# Altium PCB PCB.PcbDoc
Units mm, origin at the board's own origin, x right, y up, seen from the top; angles counter-clockwise.
Board outline 38 x 38 mm, 2 copper layers (Top Layer, Bottom Layer); 32 components, 17 nets, 108 pads, 251 vias.
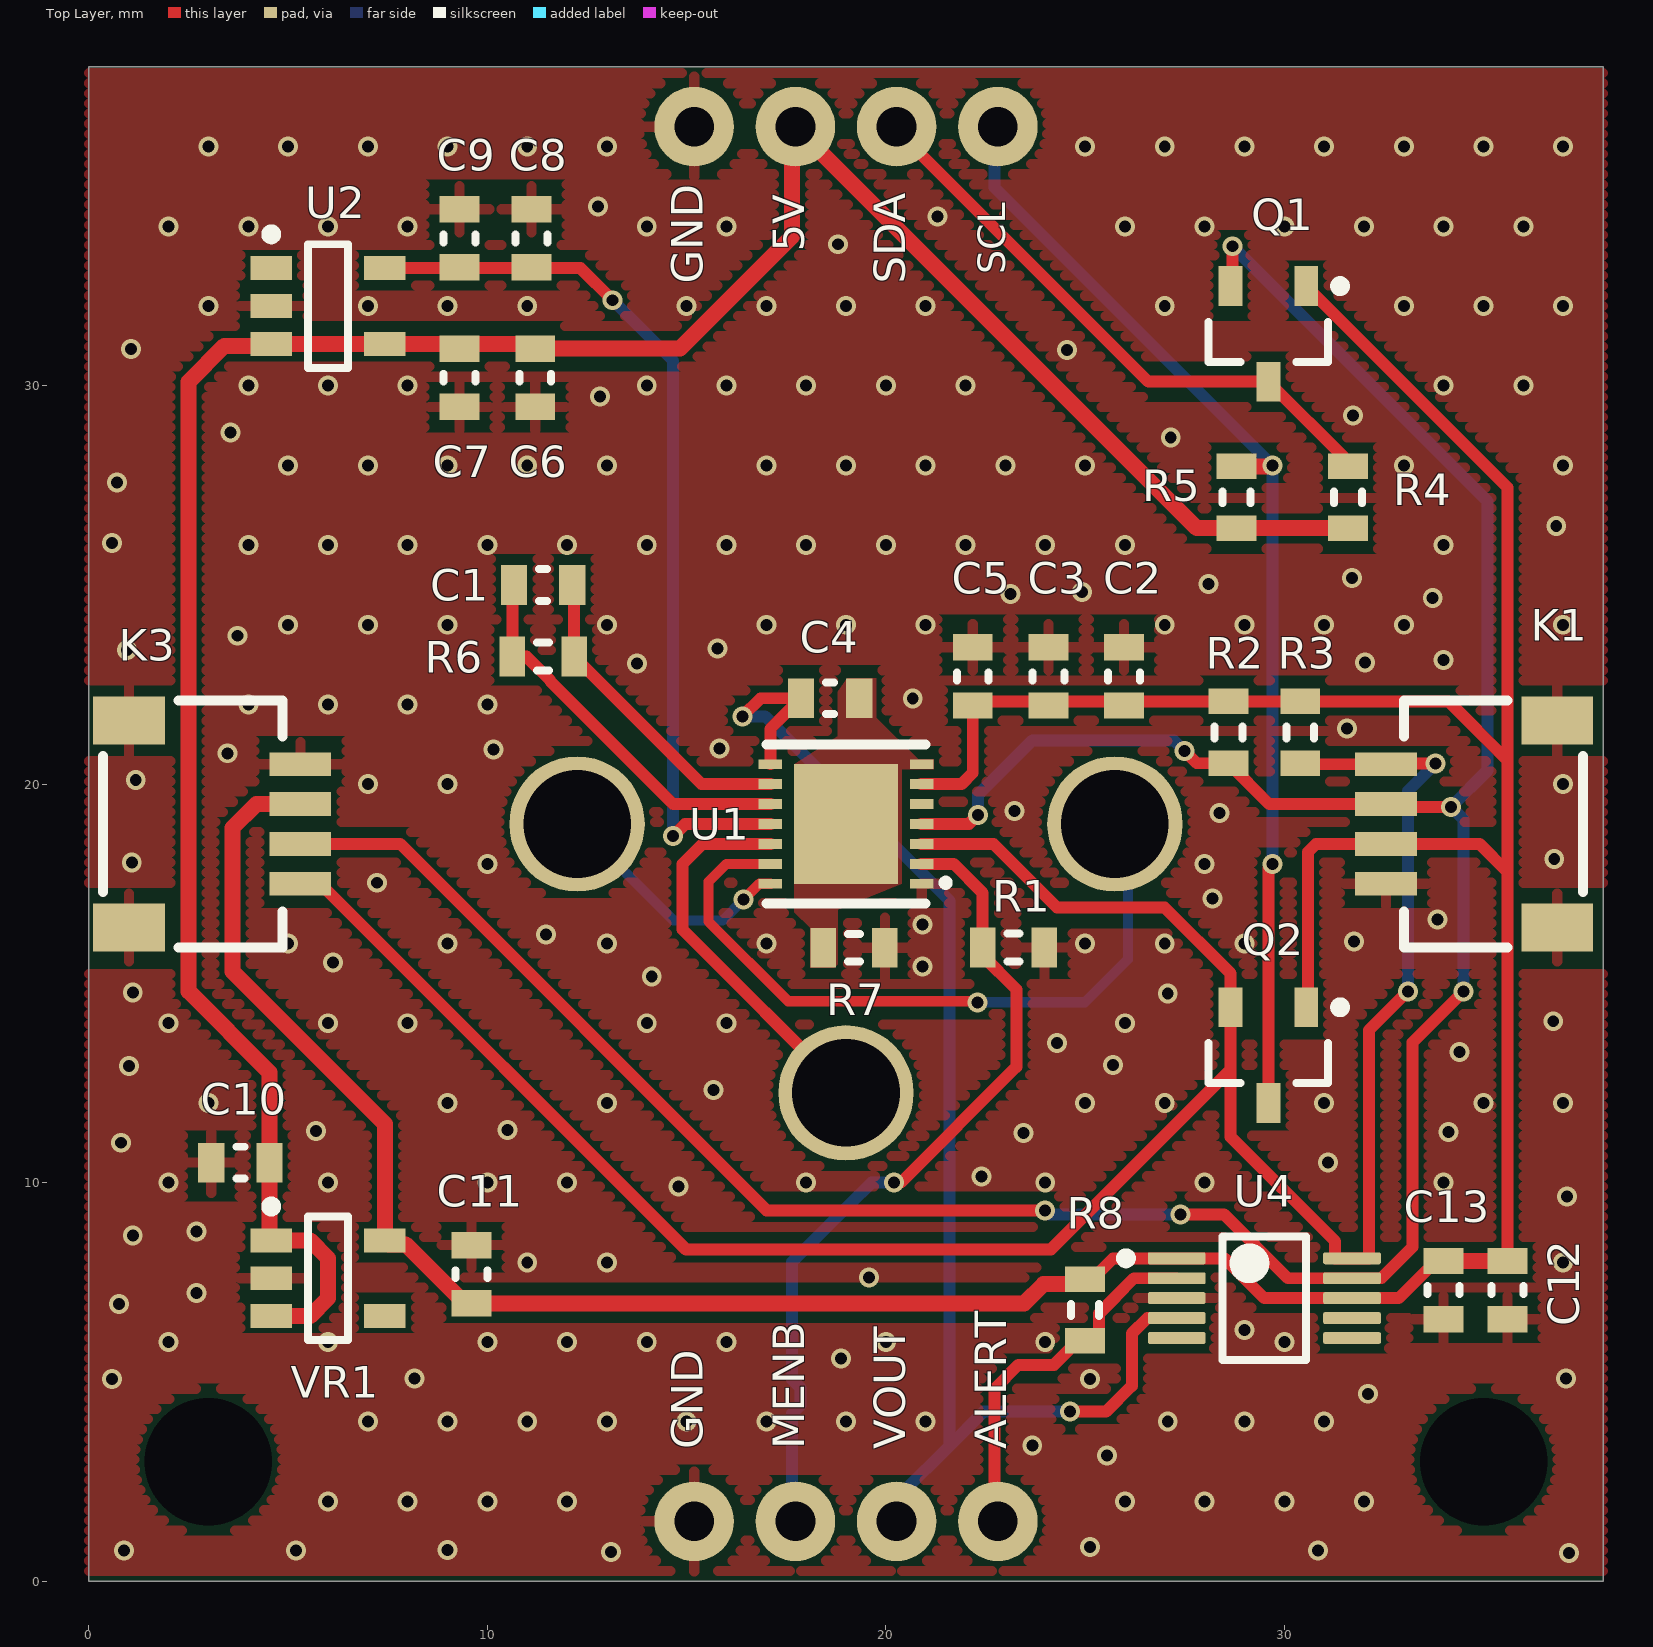
[diagram p0: Top Layer view]
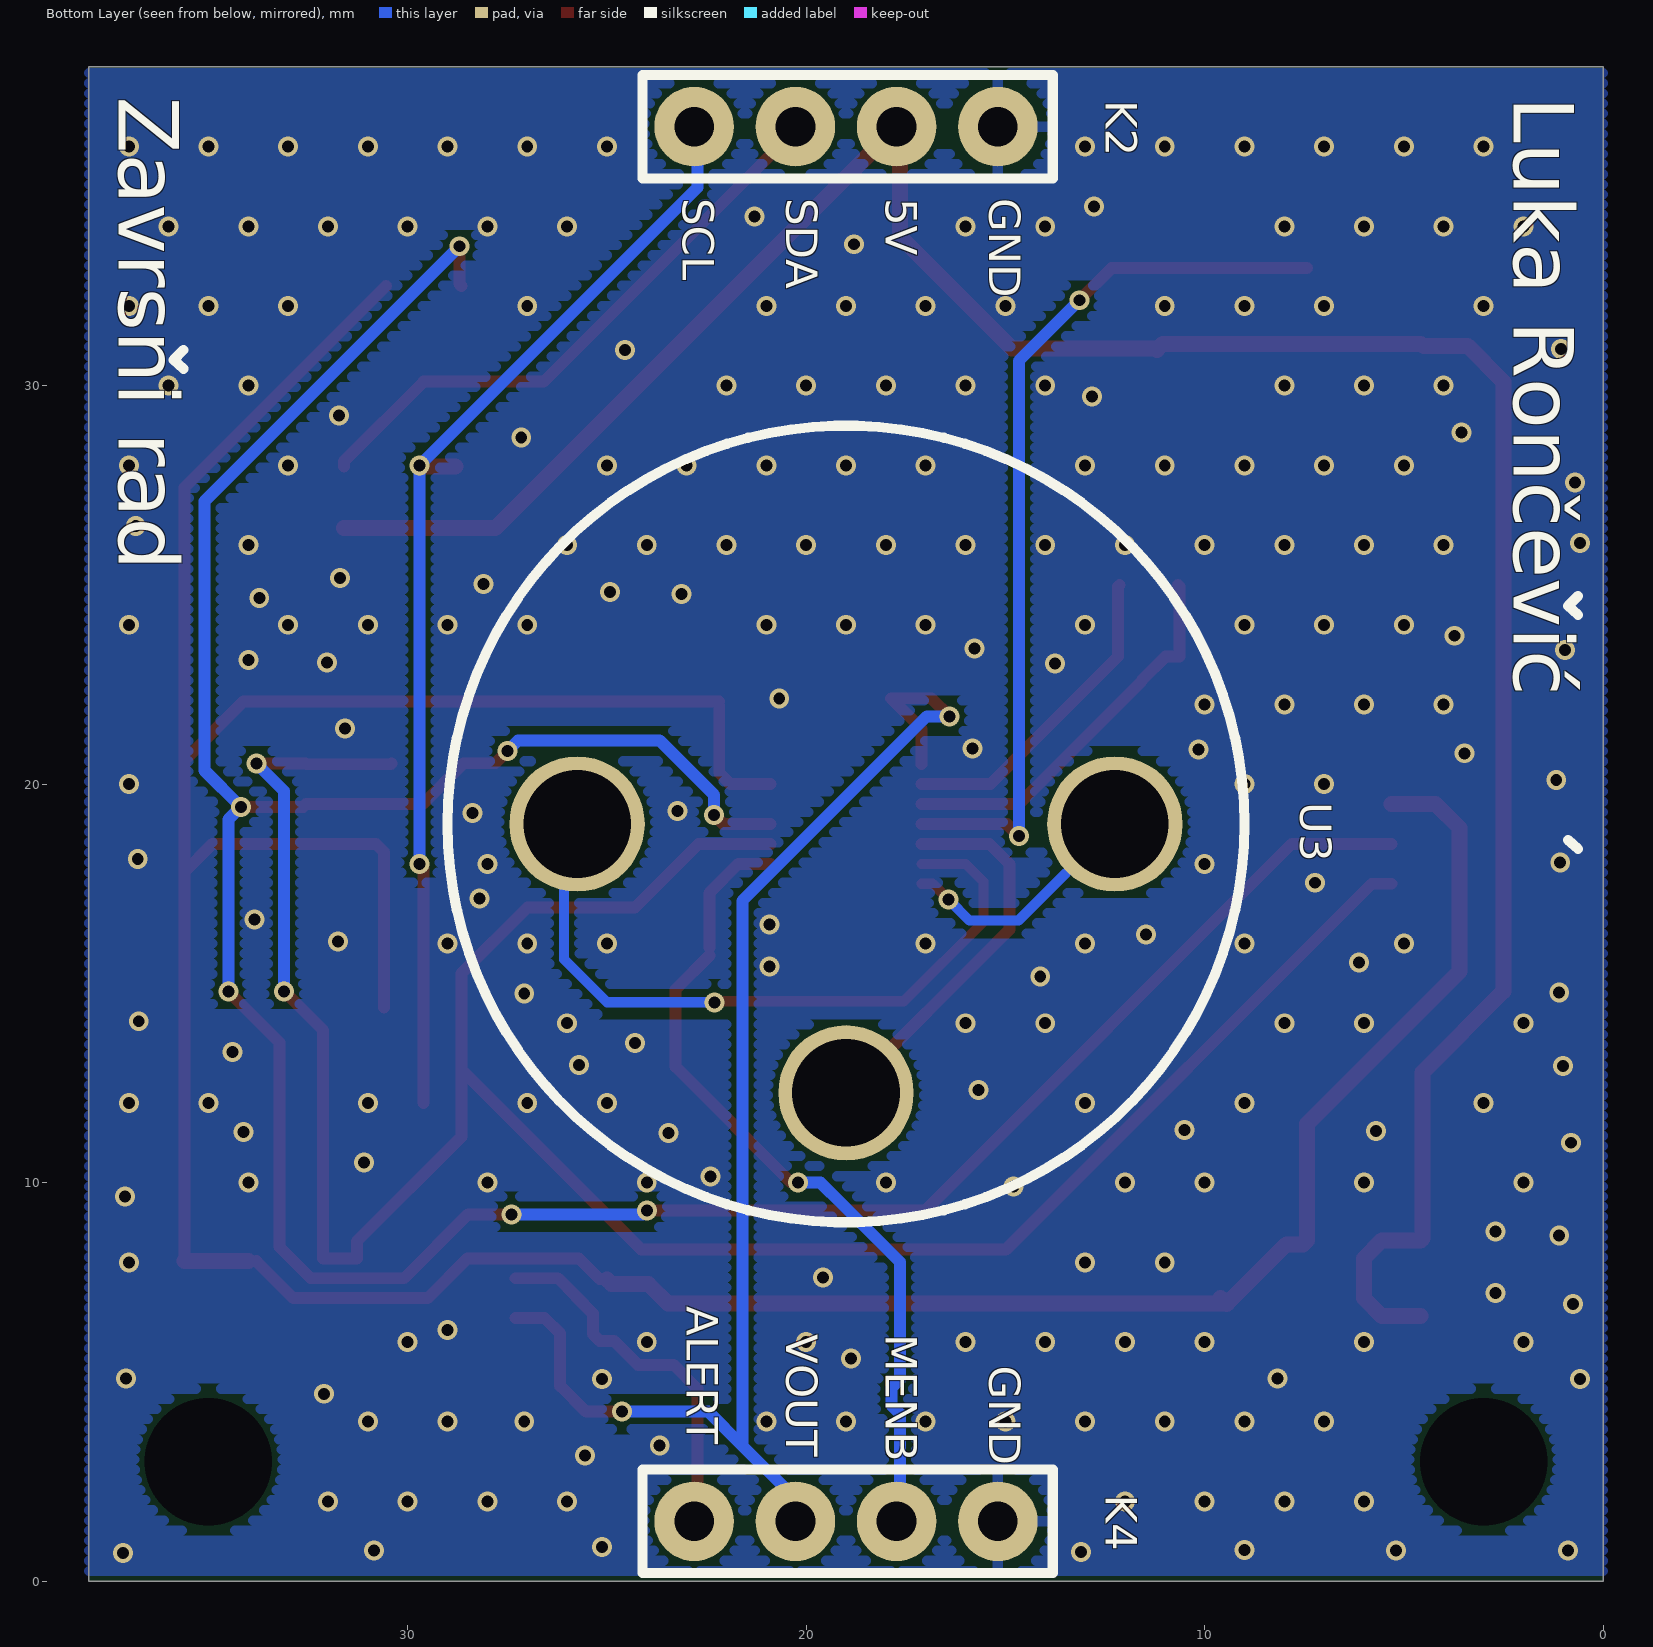
[diagram p1: Bottom Layer view, seen from below]
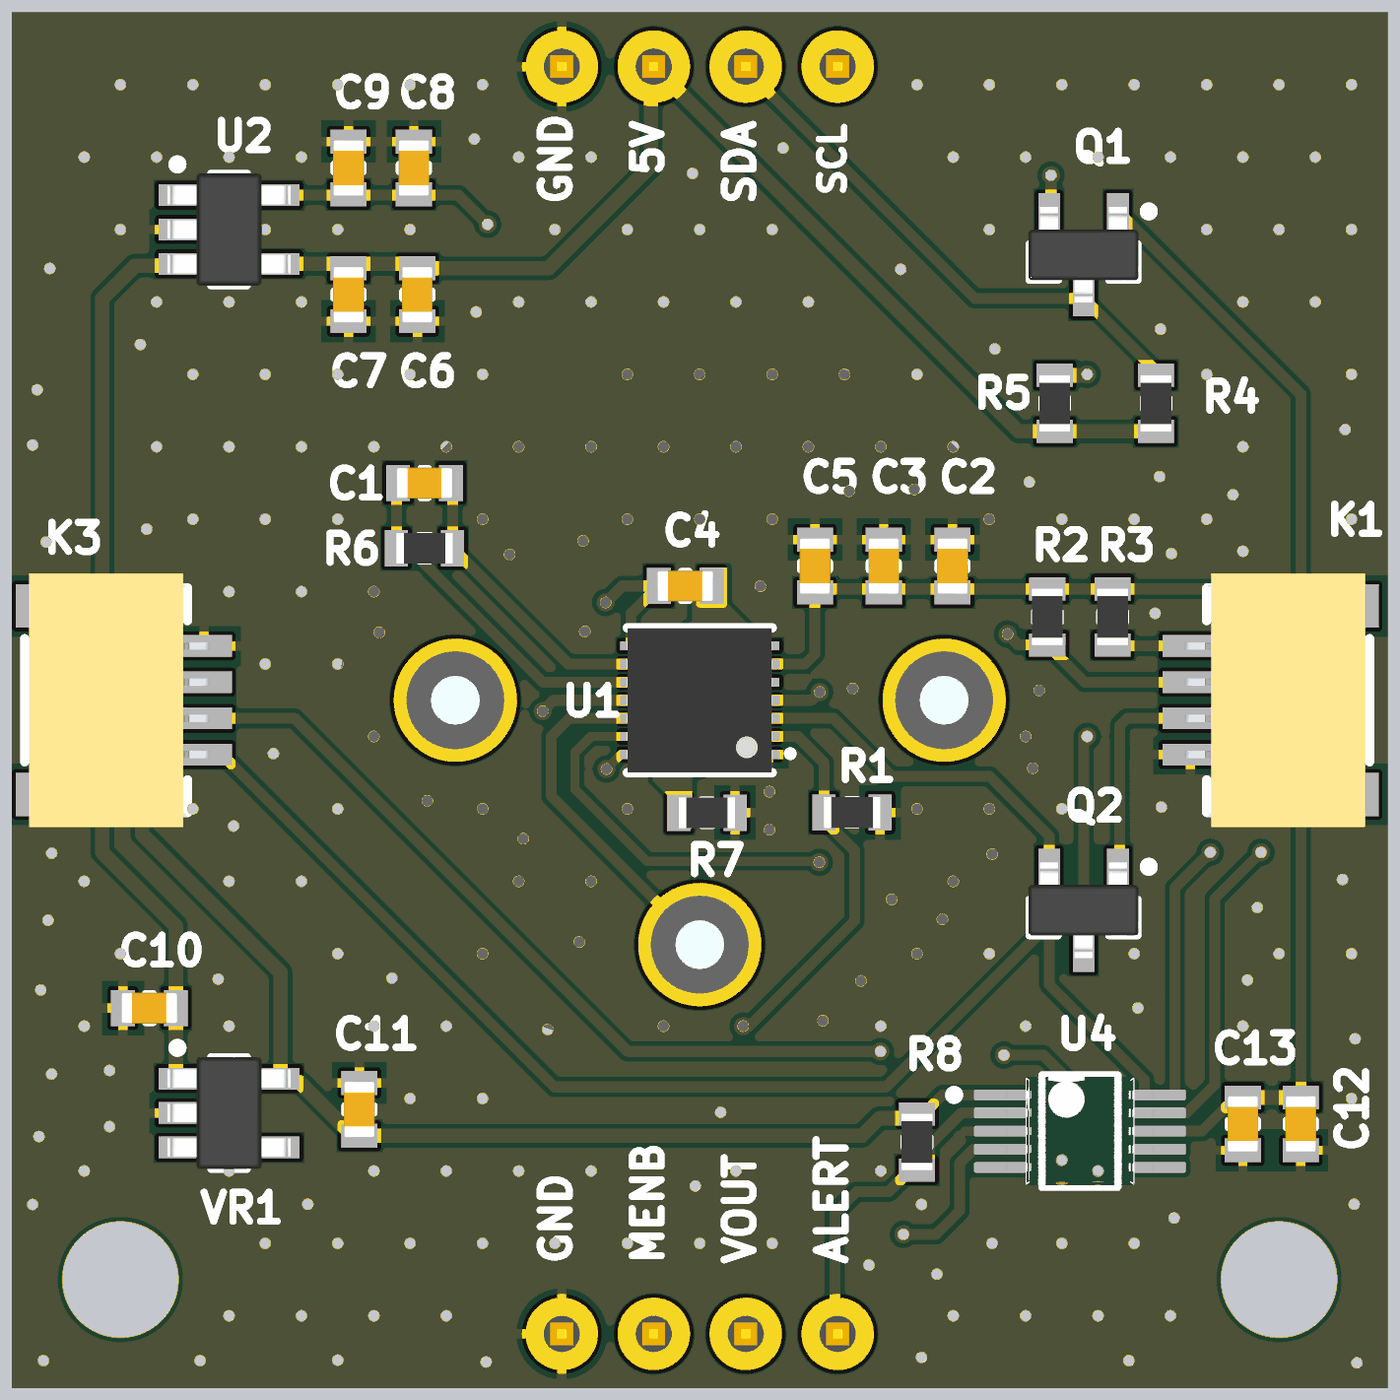
[diagram p2: 3D render of the assembled board from above, using the file's embedded part models]
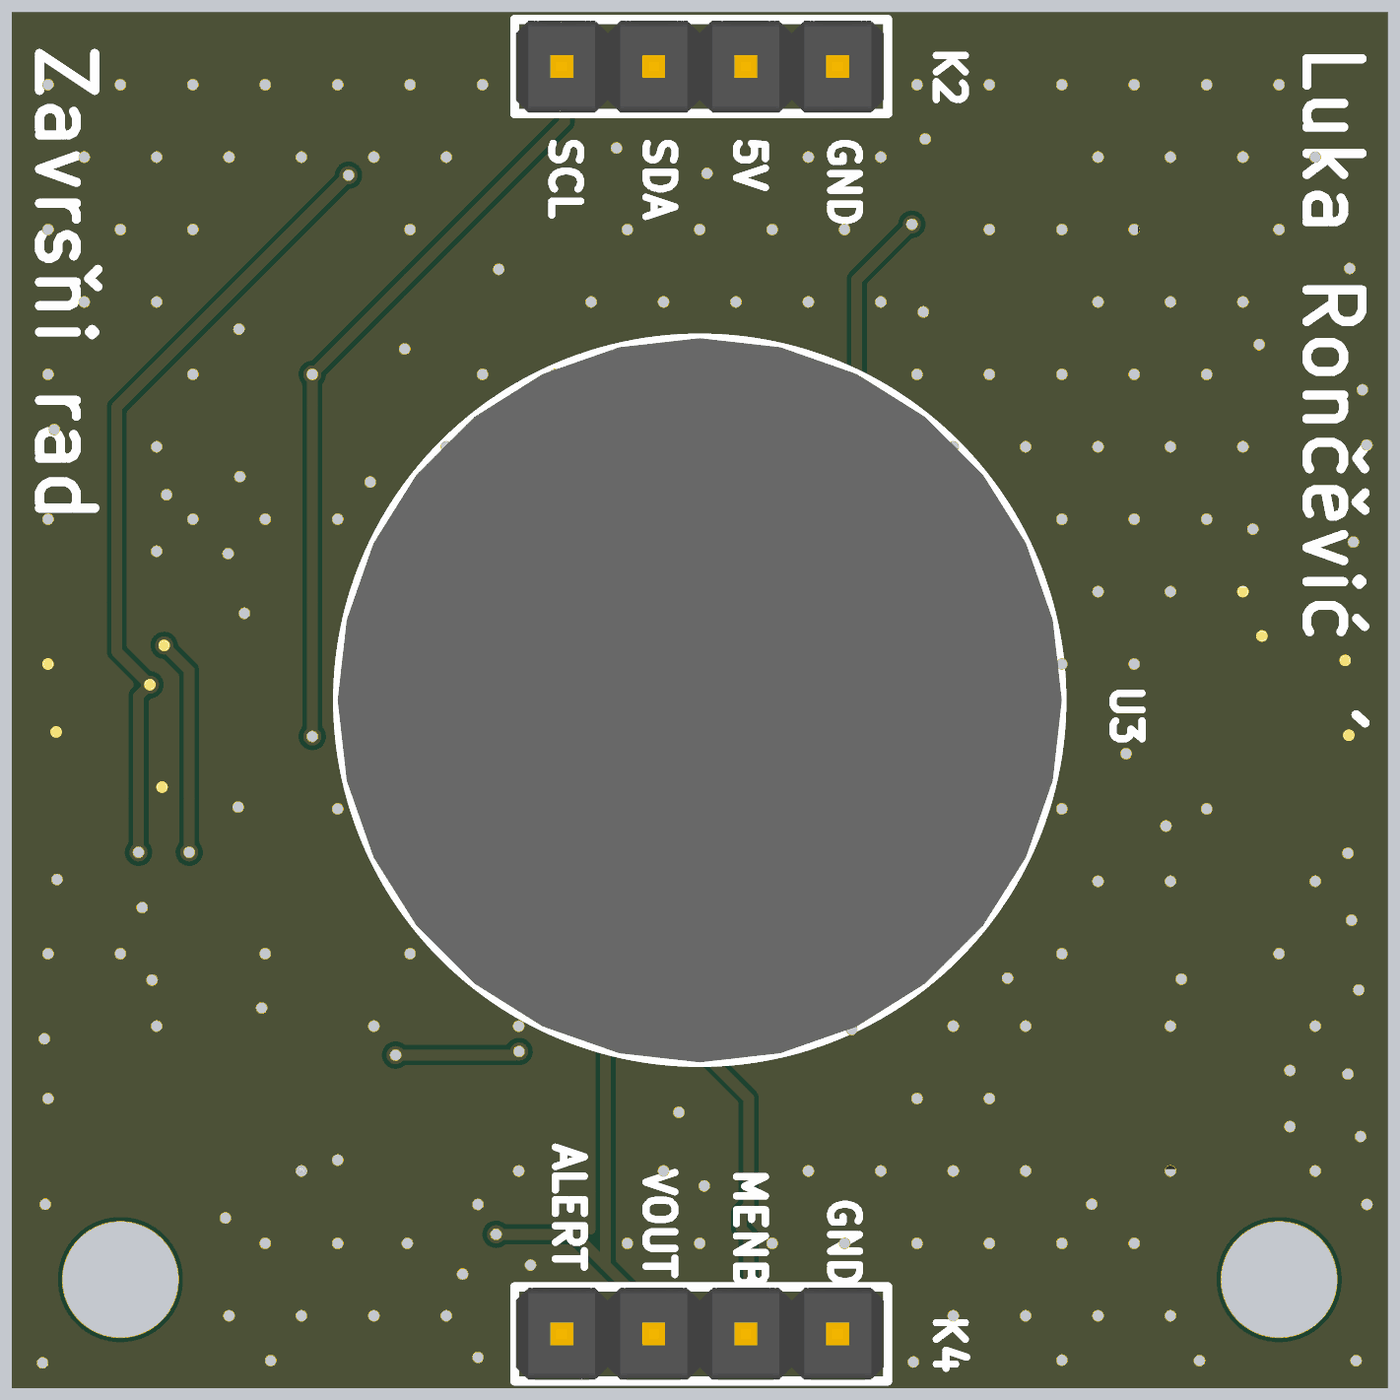
[diagram p3: 3D render of the assembled board from below, using the file's embedded part models]

## Layer stack, top to bottom
Top Solder: solder mask 0.0102, Solder Resist, Dk 3.5
Top Layer: signal copper 0.0356
Dielectric 1: dielectric 0.32, FR-4, Dk 4.8
Bottom Layer: signal copper 0.0356
Bottom Solder: solder mask 0.0102, Solder Resist, Dk 3.5

## Board outline
0,0 38,0 38,38 0,38

## Design rules (kind name [scope] priority, off if disabled: settings)
Clearance "Stitching GND" [IsStitchingVia and InNet('GND') vs (IsVia and (Not IsStitchingVia)) Or IsPad] p1: gap=0.254 ignorepadtopadclearanceinfootprint=FALSE
Clearance [All] p2: gap=0.127 ignorepadtopadclearanceinfootprint=FALSE
HoleSize [All] p1: absolutevalues=TRUE maxlimit=6 minlimit=0.025 maxpercent=80.000 minpercent=20.000
PlaneConnect PlaneConnect_1 [All] p1: planeconnectstyle=Relief reliefexpansion=0.508 reliefentries=4 reliefconductorwidth=0.254 reliefairgap=0.254
PolygonConnect PolygonConnect2 [InNet('AGND')] p1: connectstyle=Direct reliefconductorwidth=0.254 reliefentries=4 polygonreliefangle="90 Angle" airgapwidth=0.254
PolygonConnect PolygonConnect_1 [All] p2: thpad.connectstyle=Relief thpad.reliefconductorwidth=0.254 thpad.reliefentries=4 thpad.polygonreliefangle="90 Angle" thpad.airgapwidth=0.254 smdpad.connectstyle=Relief smdpad.reliefconductorwidth=0.254 smdpad.reliefentries=4 smdpad.polygonreliefangle="90 Angle" smdpad.airgapwidth=0.254 via.connectstyle=Direct via.reliefconductorwidth=0.254 via.reliefentries=4 via.polygonreliefangle="90 Angle" via.airgapwidth=0.254
RoomDefinition "Voltage supply & reference" [InComponentClass('Voltage supply & reference')] p1: confinementstyle=ConfineOut formatcopy=TRUE lockcomponents=FALSE outline 53.8,33.642 58.157,33.642 58.157,40.5 53.8,40.5
RoomDefinition "LMP91000 & NO2 Sensor" [InComponentClass('LMP91000 & NO2 Sensor')] p2: confinementstyle=ConfineOut formatcopy=TRUE lockcomponents=FALSE outline 45.9,-2.314 65.5,-2.314 65.5,15.8 45.9,15.8
RoomDefinition "Communication, connectors & headers" [InComponentClass('Communication, connectors & headers')] p3: confinementstyle=ConfineOut formatcopy=TRUE lockcomponents=FALSE outline 51.843,18.5 64.1,18.5 64.1,30.376 51.843,30.376
RoutingVias [All] p1: holewidth=0.3 width=0.5 viastyle="Through Hole" minholewidth=0.3 minwidth=0.5 maxholewidth=0.3 maxwidth=0.5
SolderMaskExpansion [All] p1: expansion=0.102 istentingtop=FALSE
Width [All] p1: maxlimit=0.5 minlimit=0.254 preferedwidth=0.3
28 further rules are at their usual default settings.

## Classes and differential pairs
component class "Voltage supply & reference": C6 C7 C8 C9 C10 C11 U2 VR1
component class "LMP91000 & NO2 Sensor": C1 C2 C3 C4 C5 C12 C13 R1 R6 R7 R8 U1 U4
component class "Communication, connectors & headers": K1 K2 K3 K4 Q1 Q2 R2 R3 R4 R5

## Components (designator, comment, footprint, x,y, rotation, side; value= is the part's Value field where it differs from the comment)
C1 "DNP" 0603C 11.4,25 r180 top
C2 "1uF" 0603C 25.981,22.706 r90 top
C3 "100nF" 0603C 24.081,22.706 r90 top
C4 "100nF" 0603C 18.6,22.156 r180 top
C5 "10nF" 0603C 22.181,22.706 r90 top
C6 "100nF" 0603C 11.2,30.2 r90 top
C7 "1uF" 0603C 9.3,30.2 r90 top
C8 "100nF" 0603C 11.104,33.7 r270 top
C9 "1uF" 0603C 9.3,33.7 r270 top
C10 "2.2uF" 0603C 3.8,10.5 r0 top
C11 "2.2uF" 0603C 9.6,7.7 r270 top
C12 "1uF" 0603C 35.6,7.3 r90 top
C13 "100nF" 0603C 34,7.3 r90 top
K1 "easyC SMD" "EasyC connector" 34.7,19 r270 top
K2 "HEADER 4x1" "HEADER MALE 4x1" 19,36.5 r180 bottom
K3 "easyC SMD" "EasyC connector" 3.155,19 r90 top
K4 "HEADER 4x1" "HEADER MALE 4x1" 19,1.5 r180 bottom
Q1 "NMOS SOT-23-3" SOT-23-3 29.6,31.3 r270 top
Q2 "NMOS SOT-23-3" SOT-23-3 29.6,13.2 r270 top
R1 "10k" 0603R 23.206,15.9 r180 top
R2 "10k" 0603R 28.6,21.3 r90 top
R3 "10k" 0603R 30.4,21.3 r90 top
R4 "10k" 0603R 31.6,27.2 r270 top
R5 "10k" 0603R 28.8,27.2 r270 top
R6 "DNP" 0603R 11.4,23.2 r180 top
R7 "0" 0603R 19.2,15.894 r0 top
R8 "10k" 0603R 25,6.8 r90 top
U1 "LMP91000" LMP91000 19,19 r270 top locked
U2 "REF4132-3.3V" SOT-23-5 6,32 r0 top
U3 "SGX-4NO2" SGX-4NO2 19,19 r180 bottom
U4 "ADS1115IDGSR" FP-DGS0010A-MFG 29.5,7.1 r0 top
VR1 "SE5218ALG-LG" SOT-23-5 6,7.6 r0 top

## Footprints (in the part's own frame and the unit in brackets; to place one, negate y for a bottom-side part, rotate by r counter-clockwise, add the part's x,y. Pads: shape width x height; smd on the part's side, far side on the other; paste and mask are expansions set on the pad)
0603C [mm] "Chip Capacitor, 2-Leads, Body 1,55x0,85mm, IPC Medium Density"
  rect 0.66x1 smd: 1(-0.73,0) 2(0.73,0)
  silkscreen extent -0.1,-0.4 0.1,0.4, body extent -0.77,-0.43 0.77,0.43, height 0.35
0603R [mm] "2-Leads, Body 1,55x0,85mm, IPC Medium Density"
  rect 0.64x1 smd: 1(-0.775,0) 2(0.775,0)
  silkscreen extent -0.15,-0.35 0.15,0.35, body extent -0.77,-0.43 0.77,0.43, height 0.45
"EasyC connector" [mm]
  rect 0.6x1.55 smd: 1(-1.5,-2.15) 2(-0.5,-2.15) 3(0.5,-2.15) 4(1.5,-2.15)
  rect 1.2x1.8 smd: 5(-2.6,2.15) 5(2.6,2.15)
  silkscreen extent -3.1,-1.7 3.1,2.8, body extent -3.5,-2.3 3.5,2.68, height 3.09
FP-DGS0010A-MFG [mm]
  rrect33% 1.45x0.3 smd paste+0 mask+0: 1(-2.2,1) 2(-2.2,0.5) 3(-2.2,0) 4(-2.2,-0.5) 5(-2.2,-1) 6(2.2,-1) 7(2.2,-0.5) 8(2.2,0) 9(2.2,0.5) 10(2.2,1)
  silkscreen extent -3.6,-1.55 1.05,1.55, body extent -3.03,-1.8 3.03,1.8, height 0.25
"HEADER MALE 4x1" [mm]
  round 2 hole 1: 1(-3.81,0) 2(-1.27,0) 3(1.27,0) 4(3.81,0)
  silkscreen extent -5.11,-1.3 5.19,1.3, body extent -5.08,-1.27 5.08,1.27, height 9.5
LMP91000 [mm]
  rect 0.25x0.6 smd: 1(1.5,1.9) 2(1,1.9) 3(0.5,1.9) 4(0,1.9) 5(-0.5,1.9) 6(-1,1.9) 7(-1.5,1.9) 8(-1.5,-1.9) 9(-1,-1.9) 10(-0.5,-1.9) 11(0,-1.9) 12(0.5,-1.9) 13(1,-1.9) 14(1.5,-1.9)
  rect 3x2.6 smd: 7(0,0)
  silkscreen extent -2,-2 2,2.55, body extent -1.99,-2 1.99,2, height 0.82
SGX-4NO2 [mm]
  round 3.4 hole 2.7: 1(-6.75,0) 2(6.75,0) 3(0,-6.75)
  silkscreen extent -10,-10 10,10, body extent -10,-10 10,10, height 16.75
SOT-23-3 [mm] "SOT23, 3-Leads, Body 2,92x2,37mm, Pitch 0,95mm, IPC Medium Density"
  rect 1x0.6 smd: 1(-1.2,0.95) 2(-1.2,-0.95) 3(1.2,0)
  silkscreen extent -1.32,-1.5 0.7,1.93, body extent -1.32,-1.52 1.32,1.52, height 1.11
SOT-23-5 [mm] "SOT23, 5-Leads, Body 2,90x2,70mm, Pitch 0,95mm, IPC Medium Density"
  rect 1.05x0.6 smd: 1(-1.425,0.95) 2(-1.425,0) 3(-1.425,-0.95) 4(1.425,-0.95) 5(1.425,0.95)
  silkscreen extent -1.55,-1.55 0.5,1.92, body extent -1.7,-1.55 1.7,1.55, height 1.45

## Part data
C1 C2 C3 C4 C5 C6 C7 C8 C9 C10 C11 C12 C13: library part 0603C
Q1 Q2: Supplier Part Number 1=522-ZXMN2A14FTA, Supplier 1=Mouser, Supplier 2=Arrow, Supplier 3=Digi-Key, Supplier Part Number 2=ZXMN2A14FTA, Supplier Part Number 3=ZXMN2A14FCT-ND
R1 R2 R3 R4 R5 R6 R7 R8: library part 0603R
U1: "The LMP91000 is a programmable analog front-end(AFE) for use in micro-power electrochemical sensing applications."
U3: "Amphenol SGX Sensortech SGX-4x Electrochemical Sensors are the industrial and commercial gas sensing products."
U4: library part CMP-0003-00385-3, "IC ADC 16BIT SIGMA-DELTA 10VSSOP", Case/Package=VSSOP, Max Operating Temperature=125°C, Max Supply Voltage=5.5V, Min Operating Temperature=-40°C, Min Supply Voltage=2V, Package Quantity=2500, Power Dissipation=900uW, Contact Plating=Gold, Conversion Rate=0.86KS/s, Integral Nonlinearity (INL)=1LSB, Interface=I2C, Lead Free="Lead Free", Max Supply Voltage (DC)=5.5V, Min Supply Voltage (DC)=2V, Number of A/D Converters=1, Number of Bits=16, Number of Converters=1, Number of Inputs=4, Number of Pins=10, Packaging="Tape and Reel", Polarity=Bipolar, Radiation Hardening=No, REACH SVHC="No SVHC", Resolution=16b, RoHS Compliant=Yes, Sampling Rate=860S/s, Series=-, Supply Type=Single
VR1: library part "VREG 3V3"

## Free pads (board coordinates)
  round 2 hole 3.2: ""(3,3) ""(35,3)

## Via types
v1: diameter 0.5, hole 0.3, Top Layer to Bottom Layer, tented both sides, 251 vias

## Nets (pads, with @x,y where several pads share a name; then routed paths per layer and width w, separated by ;. In a path a pad name is that pad's centre, name@x,y a point inside that pad or via, vN(x,y) a via of type N, cw(c..) or ccw(c..) an arc to the next point about the centre after c; other vN are vias at no path point)
3V3: C2.1 C3.1 C5.1 C11.2 C12.2 C13.2 K1.3 K3.3 Q1.1 Q2.1 R2.2 R3.2 R8.2 U1.6 U4.1 U4.8 VR1.5 | length 97
  Top Layer w0.3: U1.6 21.9,20 22.181,20.281 C5.1 ; C5.1@22.181,22.075 R2.2 R3.2 34.125,22.075 35.6,20.6 ; R8.2 25.18,7.575 25.705,8.1 U4.1 28.5,8.1 29.5,7.1 U4.8 32.87,7.1 C13.2@33.8,8.03 ; Q1.1 35.6,27.45 35.6,20.6 ; Q2.1@30.6,14.4 30.6,18.3 30.8,18.5 K1.3 34.9,18.5 35.6,17.8 ; C12.2 35.6,17.8 ; 35.6,17.8 35.6,20.6
  Top Layer w0.4: K3.3 4.2,19.5 3.6,18.9 3.6,15.3 7.425,11.475 VR1.5 7.525,8.45 7.95,8.45 9.43,6.97 C11.2@9.47,6.97 ; C11.2@9.45,6.95 C11.2@9.47,6.97 ; C11.2@9.6,7.1 C11.2@9.47,6.97 ; R8.2 24.88,7.455 23.959,7.455 23.474,6.97 C11.2 C11.2@9.47,6.97 ; C13.2 C12.2
5V: C6.2 C7.2 C10.2 K2.3 R4.2 R5.2 U2.3 U2.4 VR1.1 VR1.3 | length 64.1
  Top Layer w0.4: U2.3@4.5,31 3.4,31 2.5,30.1 2.5,14.8 4.53,12.77 C10.2 4.53,8.595 VR1.1 5.55,8.55 6,8.1 6,7.1 5.55,6.65 VR1.3 ; U2.3 U2.4 11.05,31.05 C6.2@11.2,30.9 ; C6.2 14.83,30.93 17.65,33.75 K2.3@17.65,36.5 ; K2.3 27.805,26.425 R5.2 R4.2
AGND: C4.1 R7.1 U1.7
ALERT: K4.1 R8.1 U4.2 | length 9.4
  Top Layer w0.3: K4.1@22.73,1.5 22.73,4.83 23.325,5.425 24.22,5.425 24.82,6.025 R8.1 25.18,6.025 25.35,6.195 25.35,6.713 25.777,7.14 25.777,7.152 26.225,7.6 U4.2
C1: C1.2 R6.2 U1.10 | length 9.8
  Top Layer w0.3: C1.2 10.625,24.955 R6.2 10.982,23.2 11.578,22.604 11.578,22.585 14.663,19.5 U1.10
C2: C1.1 R6.1 U1.9 | length 8.1
  Top Layer w0.3: C1.1 12.175,24.955 R6.1 15.375,20 U1.9
CE: U1.14 U3.2 | length 6.2
  Top Layer w0.254: v1(16.425,17.1) 16.825,17.5 U1.14
  Bottom Layer w0.254: U3.2 14.675,16.575 15.9,16.575 v1(16.425,17.1)
GND: C2.2 C3.2 C5.2 C6.1 C7.1 C8.1 C9.1 C10.1 C11.1 C12.1 C13.1 K1.4 K1.5 K2.4 K3.4 K3.5 K4.4 R1.1 R7.2 U1.1 U2.2 U4.3 VR1.2
  other v1: 37.15,0.7 13.1,0.725 0.875,0.762 5.2,0.762 30.85,0.762 9,0.775 25.125,0.85 6,2 8,2 10,2 12,2 26,2 28,2 30,2 32,2 25.55,3.15 23.675,3.4 7,4 9,4 11,4 13,4 15,4 17,4 19,4 21,4 27.075,4 29,4 31,4 32.1,4.7 0.575,5.075 8.175,5.08 25.125,5.075 37.075,5.08 18.875,5.588 2,6 6,6 10,6 12,6 14,6 16,6 20,6 24,6 30,6 29,6.3 0.75,6.95 2.7,7.225 19.575,7.62 11,8 13,8 37,8 1.1,8.675 2.7,8.775 37.1,9.65 14.8,9.906 2,10 6,10 10,10 12,10 18,10 24,10 28,10 34,10 22.4,10.15 31.1,10.5 0.8,11 23.45,11.25 34.125,11.275 5.7,11.3 10.5,11.325 3,12 9,12 13,12 25,12 27,12 31,12 35,12 37,12 15.675,12.325 1,12.925 25.7,12.95 34.4,13.275 24.3,13.5 2,14 6,14 8,14 14,14 16,14 26,14 36.75,14.05 27.075,14.75 1.1,14.775 14.125,15.175 20.925,15.425 6.125,15.525 5,16 9,16 13,16 17,16 25,16 27,16 29,16 31.75,16.05 11.475,16.225 20.925,16.475 33.85,16.6 28.2,17.125 7.225,17.526 10,18 28,18 1.075,18.034 36.775,18.125 28.375,19.275 23.225,19.325 7,20 9,20 37,20 1.175,20.1 3.475,20.775 10.15,20.875 15.825,20.9 31.575,21.4 4,22 6,22 8,22 10,22 20.675,22.15 13.75,23.025 32.025,23.05 34,23.114 0.95,23.368 15.775,23.4 3.725,23.725 5,24 7,24 9,24 13,24 17,24 19,24 21,24 27,24 29,24 31,24 33,24 37,24 33.725,24.675 23.125,24.775 24.925,24.825 28.1,25.025 31.7,25.175 4,26 6,26 8,26 10,26 12,26 14,26 16,26 18,26 20,26 22,26 24,26 26,26 34,26 0.575,26.05 36.825,26.475 0.7,27.575 5,28 7,28 9,28 11,28 13,28 17,28 19,28 21,28 23,28 25,28 33,28 37,28 27.15,28.702 3.55,28.825 31.725,29.25 12.825,29.725 4,30 6,30 8,30 14,30 16,30 18,30 20,30 22,30 34,30 36,30 24.55,30.9 1.05,30.925 3,32 7,32 9,32 11,32 15,32 17,32 19,32 21,32 27,32 33,32 35,32 37,32 18.8,33.55 2,34 4,34 6,34 8,34 14,34 16,34 26,34 28,34 30,34 32,34 34,34 36,34 21.3,34.25 12.775,34.5 3,36 5,36 7,36 9,36 11,36 13,36 25,36 27,36 29,36 31,36 33,36 35,36 37,36
MENB: K4.3 R1.2 U1.2 | length 20.7
  Top Layer w0.3: v1(20.2,10) 20.37,10 23.275,12.905 23.275,14.85 R1.2@22.425,15.7 ; U1.2 21.7,18 22.431,17.269 R1.2
  Bottom Layer w0.3: K4.3@17.65,1.5 17.65,4.205 17.857,4.412 17.857,4.848 17.65,5.055 17.65,8.01 19.086,9.446 19.64,10 v1(20.2,10)
RE: U1.13 U3.1 | length 18.1
  Top Layer w0.254: U1.13 16,18 15.55,17.55 15.55,16.55 17.55,14.55 22.275,14.55 v1(22.3,14.525)
  Bottom Layer w0.254: v1(22.3,14.525) 25,14.525 26.075,15.6 26.075,18.675 U3.1
SCL_3v3: K1.1 K3.1 Q2.2 R3.1 U1.3 U4.10 | length 63.7
  Top Layer w0.3: K3.1 5.805,17.5 14.985,8.32 24.14,8.32 28.65,12.83 ; U1.3 22.7,18.5 24.3,16.9 27,16.9 28.65,15.25 Q2.2 28.65,12.83 ; R3.1 30.425,20.5 K1.1 32.565,20.515 v1(33.791,20.515) ; v1(33.1,14.8) 32.123,13.823 32.123,8.1 U4.10 31.276,8.1 31.276,8.524 28.65,11.15 28.65,12.83
  Bottom Layer w0.3: v1(33.1,14.8) 33.1,19.823 v1(33.791,20.515)
SCL_5: K2.1 Q2.3 R5.1 | length 28.2
  Top Layer w0.3: Q2.3 v1@29.6,17.9
  Top Layer w0.4: R5.1 29.675,27.975 v1(29.7,28)
  Bottom Layer w0.3: K2.1@22.73,36.5 22.73,34.97 v1(29.7,28) v1(29.7,18)
SDA_3v3: K1.2 K3.2 Q1.2 R2.1 U1.4 U4.9 | length 77.7
  Top Layer w0.3: K3.2 7.81,18.5 17.01,9.3 v1(23.99,9.3) ; U1.4 22.085,19 v1(22.313,19.227) ; v1(27.4,9.2) 28.49,9.2 30.09,7.6 U4.9 32.438,7.6 33.223,8.385 33.223,13.523 v1(34.5,14.8) ; v1(27.5,20.828) 27.803,20.525 R2.1 29.625,19.5 K1.2 32.622,19.428 v1(34.185,19.428) ; Q1.2 28.7,32.55 v1(28.7,33.5)
  Bottom Layer w0.3: v1(22.313,19.227) 22.313,19.733 23.68,21.1 27.228,21.1 v1(27.5,20.828) ; v1(23.99,9.3) 24.09,9.2 v1(27.4,9.2) ; v1(28.7,33.5) 35.1,27.1 35.1,20.343 v1(34.185,19.428) 34.5,19.114 v1(34.5,14.8)
SDA_5: K2.2 Q1.3 R4.1 | length 15
  Top Layer w0.3: K2.2@20.19,36.5 26.59,30.1 Q1.3 31.6,28.1 R4.1
VOUT: C4.2 K4.2 U1.8 U4.4 | length 34.6
  Top Layer w0.3: v1(16.4,21.7) 16.856,22.156 C4.2 17.1,21.386 U1.8 ; v1(24.625,4.25) 25.525,4.25 26.175,4.9 26.175,6.213 26.562,6.6 U4.4
  Bottom Layer w0.3: v1(16.4,21.7) 16.971,21.7 21.6,17.071 21.6,10.345 21.6,9.655 21.6,6.345 21.6,5.655 21.6,3.4 ; K4.2@20.19,1.5 20.19,1.99 K4.2@20.3,2.1 ; K4.2@20.4,2.2 21.6,3.4 ; v1(24.625,4.25) 22.45,4.25 21.6,3.4
VREF: C8.2 C9.2 U1.11 U2.5 | length 22.7
  Top Layer w0.3: U2.5 12.336,32.95 v1(13.141,32.144) ; v1(14.663,18.7) 14.963,19 U1.11
  Bottom Layer w0.3: v1(13.141,32.144) 14.663,30.623 v1(14.663,18.7)
WE: U1.12 U3.3 | length 9.9
  Top Layer w0.3: U1.12 15.4,18.5 14.9,18 14.9,16.35 U3.3
pads on no net: U1.5 U2.1 U4.5 U4.6 U4.7 VR1.4

## Polygon pours and split planes (outlines as drawn)
GND on Top Layer "GND" (hatched Horizontal grid 0.254 track 0.254, pour order 1): 0,0 38,0 38,38 0,38
AGND on Top Layer "AGND" (solid, pour order 0): 21.2,20.62 20.81,20.62 19.76,21.67 19.76,22.66 19.03,22.66 18.792,22.32 18.792,21.2 17.7,20.5 17.7,16.79 18.1,16.39 18.1,15.39 18.704,15.39 18.792,15.478 18.792,16.85 20.4,17.5 20.4,20.38 21.2,20.38
GND on Bottom Layer "GND" (hatched Horizontal grid 0.254 track 0.254, pour order 3): 0,0 38,0 38,38 0,38

## Silkscreen, mask and mechanical layers (free items; w line width, h text height)
Top Overlay:
  text "5V" at 17.946,33.363 h0.8 r90
  text "SCL" at 23,32.8 h0.7 r90
  text "GND" at 15.406,32.563 h0.8 r90
  text "SDA" at 20.486,32.563 h0.8 r90
  text "GND" at 15.406,3.304 h0.8 r90
  text "MENB" at 17.946,3.304 h0.8 r90
  text "VOUT" at 20.486,3.304 h0.8 r90
  text "ALERT" at 23.026,3.304 h0.8 r90
Bottom Overlay:
  lines w0.254: 0.625,18.375 0.875,18.6 ; 0.625,24.25 0.875,24.475 0.625,24.725 ; 35.625,30.425 35.875,30.65 35.625,30.9
  text "Luka Rončević" at 2.246,37.246 h1.52 r90
  text "Zavrsni rad" at 37.246,37.246 h1.52 r90
  text "GND" at 15.4,34.7 h0.8 r90
  text "5V" at 18,34.7 h0.8 r90
  text "SDA" at 20.5,34.7 h0.8 r90
  text "SCL" at 23.1,34.7 h0.8 r90
  text "ALERT" at 23,6.9 h0.8 r90
  text "MENB" at 18,6.2 h0.8 r90
  text "VOUT" at 20.5,6.2 h0.8 r90
  text "GND" at 15.4,5.4 h0.8 r90
OUTLINE:
  the board outline again, w0.2